# EAGLE board McPiFace-Pi-4-Audio-V1.0 (EAGLE 7.4.0)
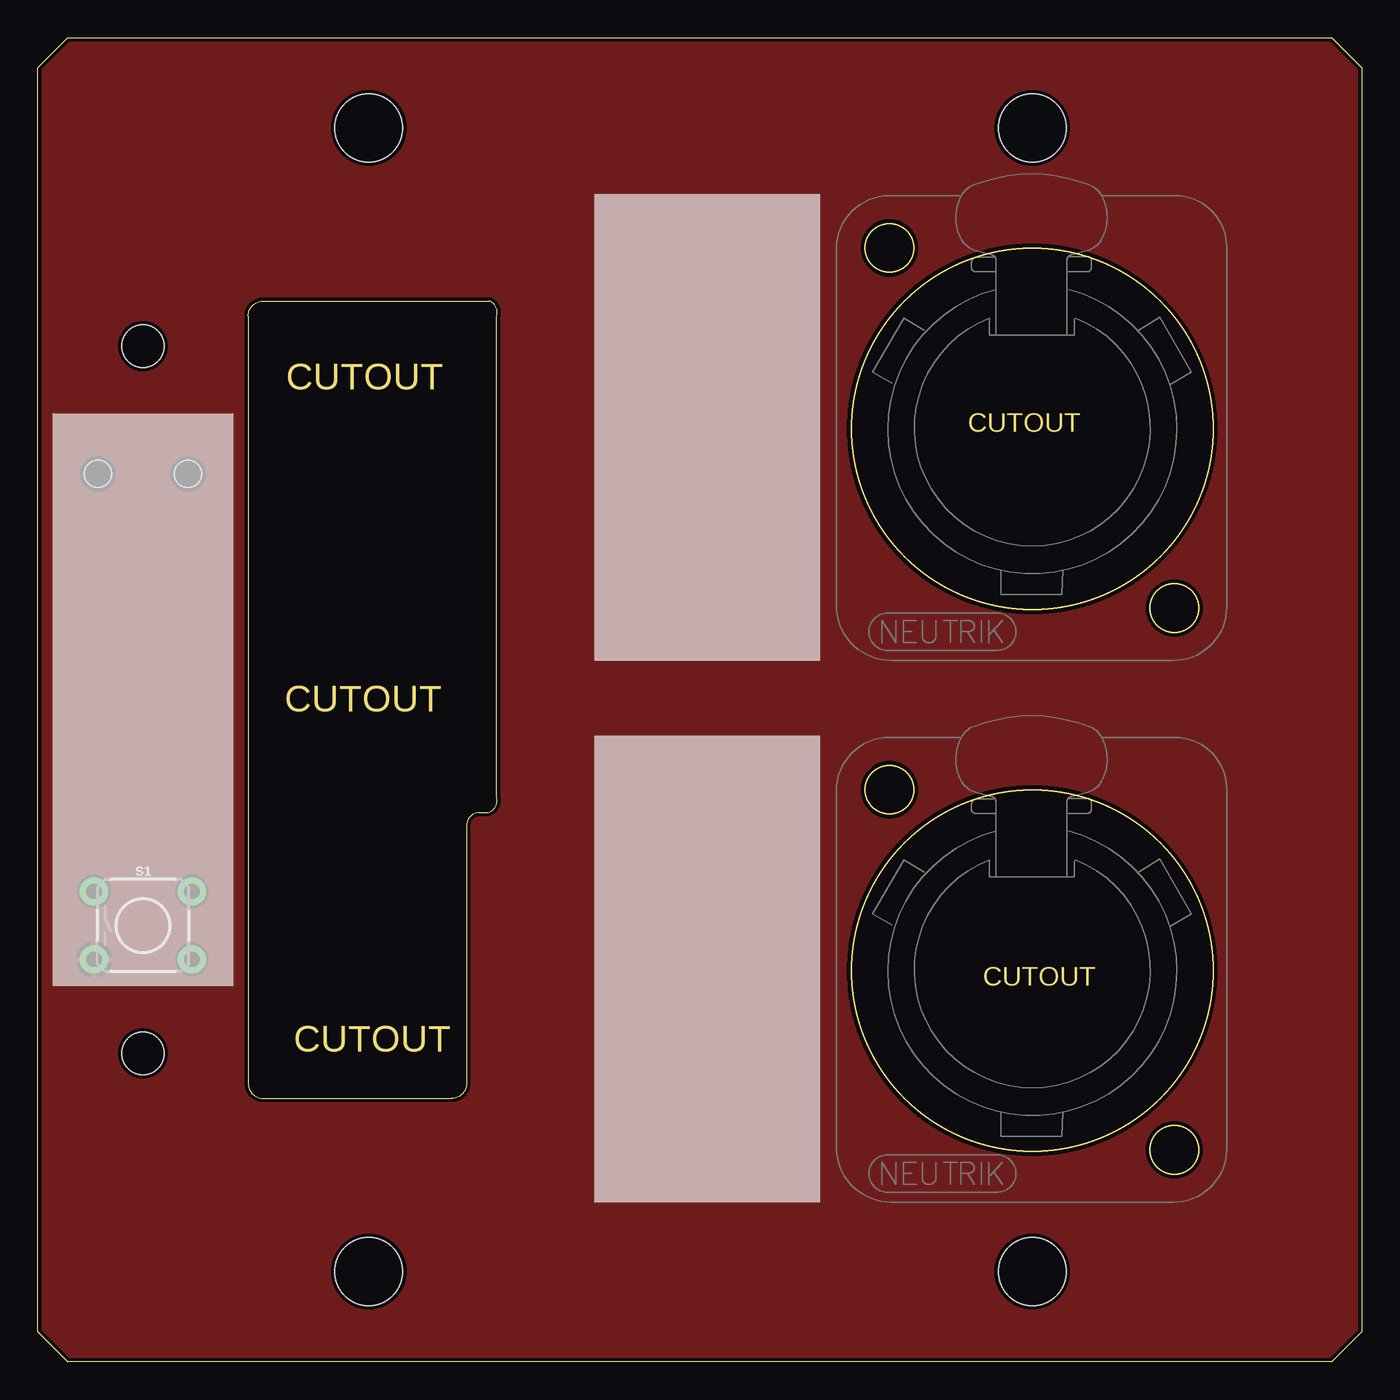
[diagram p0: board, top side]
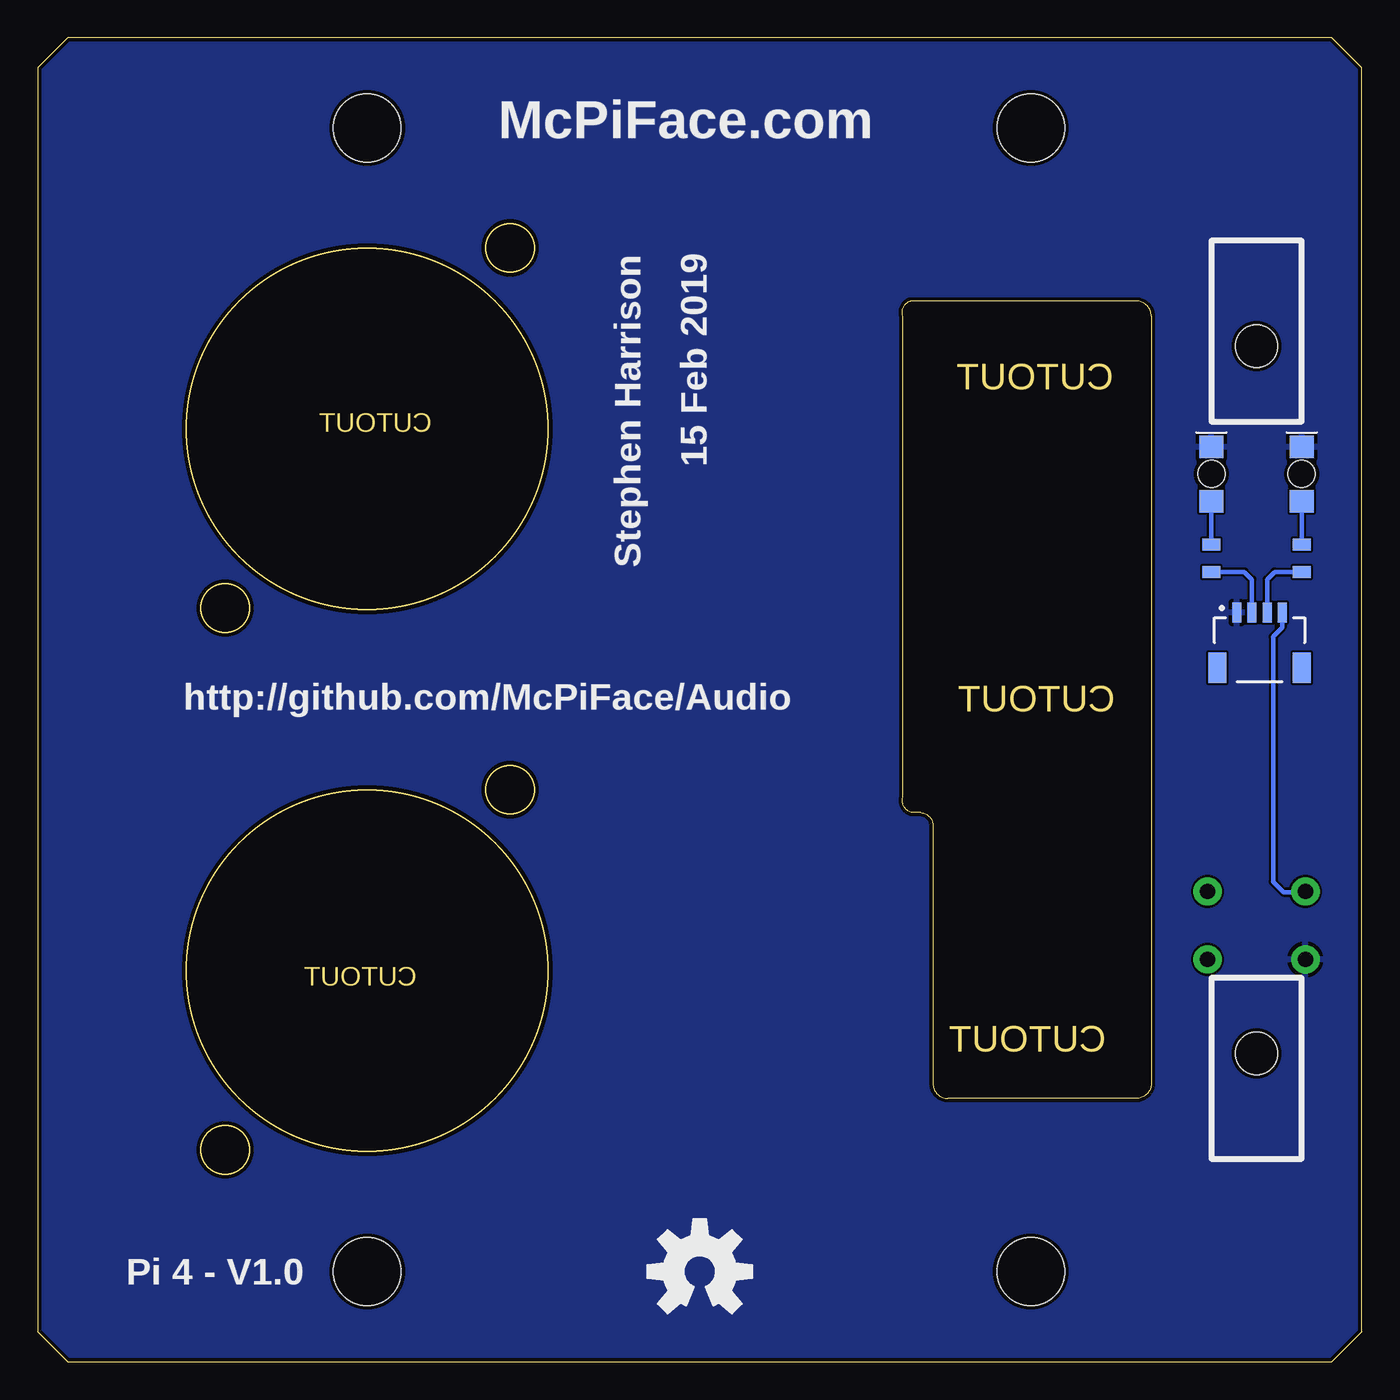
[diagram p1: board, bottom side, seen from below]

Size 88 x 88 mm. Coordinates in mm from the lower left corner, seen from the top.
Copper layers (1*16): Top 0.035mm / dielectric 1.5mm / Bottom 0.035mm
Design rules "dirt_cheap_dirty_boards.v1.1": minimum track width 6mil, minimum drill 12mil, track to track 6mil, track to pad 6mil, pad to pad 6mil, via to via 6mil, smd to smd 0mil, copper to edge 10mil, drill to drill 10mil, minimum pad ring 10mil, minimum via ring 6mil, stop-mask expansion 2mil, vias tented up to drill 25mil, thermal gap 10mil

## Footprints (pad centres in the part's own frame; a part is rotated, then mirrored left to right if it is on the bottom)
LED-1206-BOTTOM-2.0MM = smd 1.5 x 1.6: A -1.8,0; C 1.8,0 | hole 1.8: 0,0
0805 = smd 0.8 x 1.2: 1 -0.9,0; 2 0.9,0
TACTILE_SWITCH_PTH_6.0MM_NO_TOP_RESIST = drill 1.016 pad 1.88: 1 -3.251,2.261; 2 3.251,2.261; 3 -3.251,-2.261; 4 3.251,-2.261
JST-4-SH-1.0MM-SIDE = smd 0.6 x 1.35: GND -1.5,0; GREEN 0.5,0; RED -0.5,0; RESET 1.5,0 | smd 1.2 x 2: NC1 2.8,-3.675; NC2 -2.8,-3.675
MC_PI_4-DOUBLE_FACE = hole 2.8: 7,20.5; 7,67.5 | hole 4.5: 22,82; 66.1,82; 22,6; 66.1,6

## Placement (x,y rotation side)
D2  [LED-1206-BOTTOM-2.0MM]  4,59 90 bottom
D3  [LED-1206-BOTTOM-2.0MM]  10,59 90 bottom
FRAME1  FRAME-LETTER  [CREATIVE_COMMONS]  6.2,-18 0 top  (outside the outline)
LOGO1  OSHW-LOGOL  [OSHW-LOGO-L]  44,6 0 bottom
R1  1k5  [0805]  10,53.4 90 bottom
R2  1k5  [0805]  4,53.4 90 bottom
S1  MOMENTARY-SWITCH-SPSTTACKTILE_SWITCH_PTH_6.0MM_NO_TOP_RESIST  [TACTILE_SWITCH_PTH_6.0MM_NO_TOP_RESIST]  7,29 0 top
U$1  XLR-PANEL  [NC3FD-V-BAG-PANEL-COUTOUT]  66.1,62 0 top
U$2  XLR-PANEL  [NC3FD-V-BAG-PANEL-COUTOUT]  66.1,26 0 top
U$3  MC_PI_FACE_CONNECTORS_LEDSSIDE  [JST-4-SH-1.0MM-SIDE]  6.8,49.8 0 bottom
U$4  MC_PI_4_FACE_PANELDOUBLE  [MC_PI_4-DOUBLE_FACE]  0,0 0 top

## Library data of the parts
D2 = ThingySticks; COLOR: Green; FARNELL: 2217905; FORWARD_VOLTAGE: 2.1
D3 = ThingySticks; COLOR: Hyper Red; FARNELL: 2217903; FORWARD_VOLTAGE: 1.95
FRAME1 LOGO1 = SparkFun-Aesthetics
R1 R2 = SparkFun-Resistors
S1 U$1 U$2 = ThingySticks
U$3 = McPiFace; FARNELL: 1830839; MFG: SM04B-SRSS-TB(LF)(SN)
U$4 = McPiFace

## Nets
GND: D2.C D3.C S1.3 U$3.GND
N$3: D2.A R2.2
N$4: D3.A R1.2
N$5: R1.1 U$3.RED
N$6: R2.1 U$3.GREEN
N$7: S1.1 U$3.RESET

## Tracks (layer width: path | path; a pad name or v marks a point on that pad's centre or on a via)
GND
  pour Top: -1,88.5 88.7,88.5 88.7,-1 -1,-1
  pour Bottom: -1,88.5 88.7,88.5 88.7,-1 -1,-1
N$3
  Bottom 0.305: R2.2 D2.A
N$4
  Bottom 0.305: R1.2 D3.A
N$5
  Bottom 0.305: U$3.RED 7.3,52 7.8,52.5 R1.1
N$6
  Bottom 0.305: U$3.GREEN 6.3,52 5.8,52.5 R2.1
N$7
  Bottom 0.305: U$3.RESET 5.3,48.8 5.9,48.2 5.9,31.9 5.2,31.2 3.81,31.2 S1.1

## Text on the board
Dimension: CUTOUT | CUTOUT
bNames: McPiFace.com | 15 Feb 2019 | Stephen Harrison | http://github.com/McPiFace/Audio | Pi 4 - V1.0